# Altium PCB PCB.PcbDoc
Units mil, origin at the board's own origin, x right, y up, seen from the top; angles counter-clockwise.
Board outline 6000 x 4000 mil, 2 copper layers (Top Layer, Bottom Layer); 53 components, 28 nets, 106 pads, 0 vias.
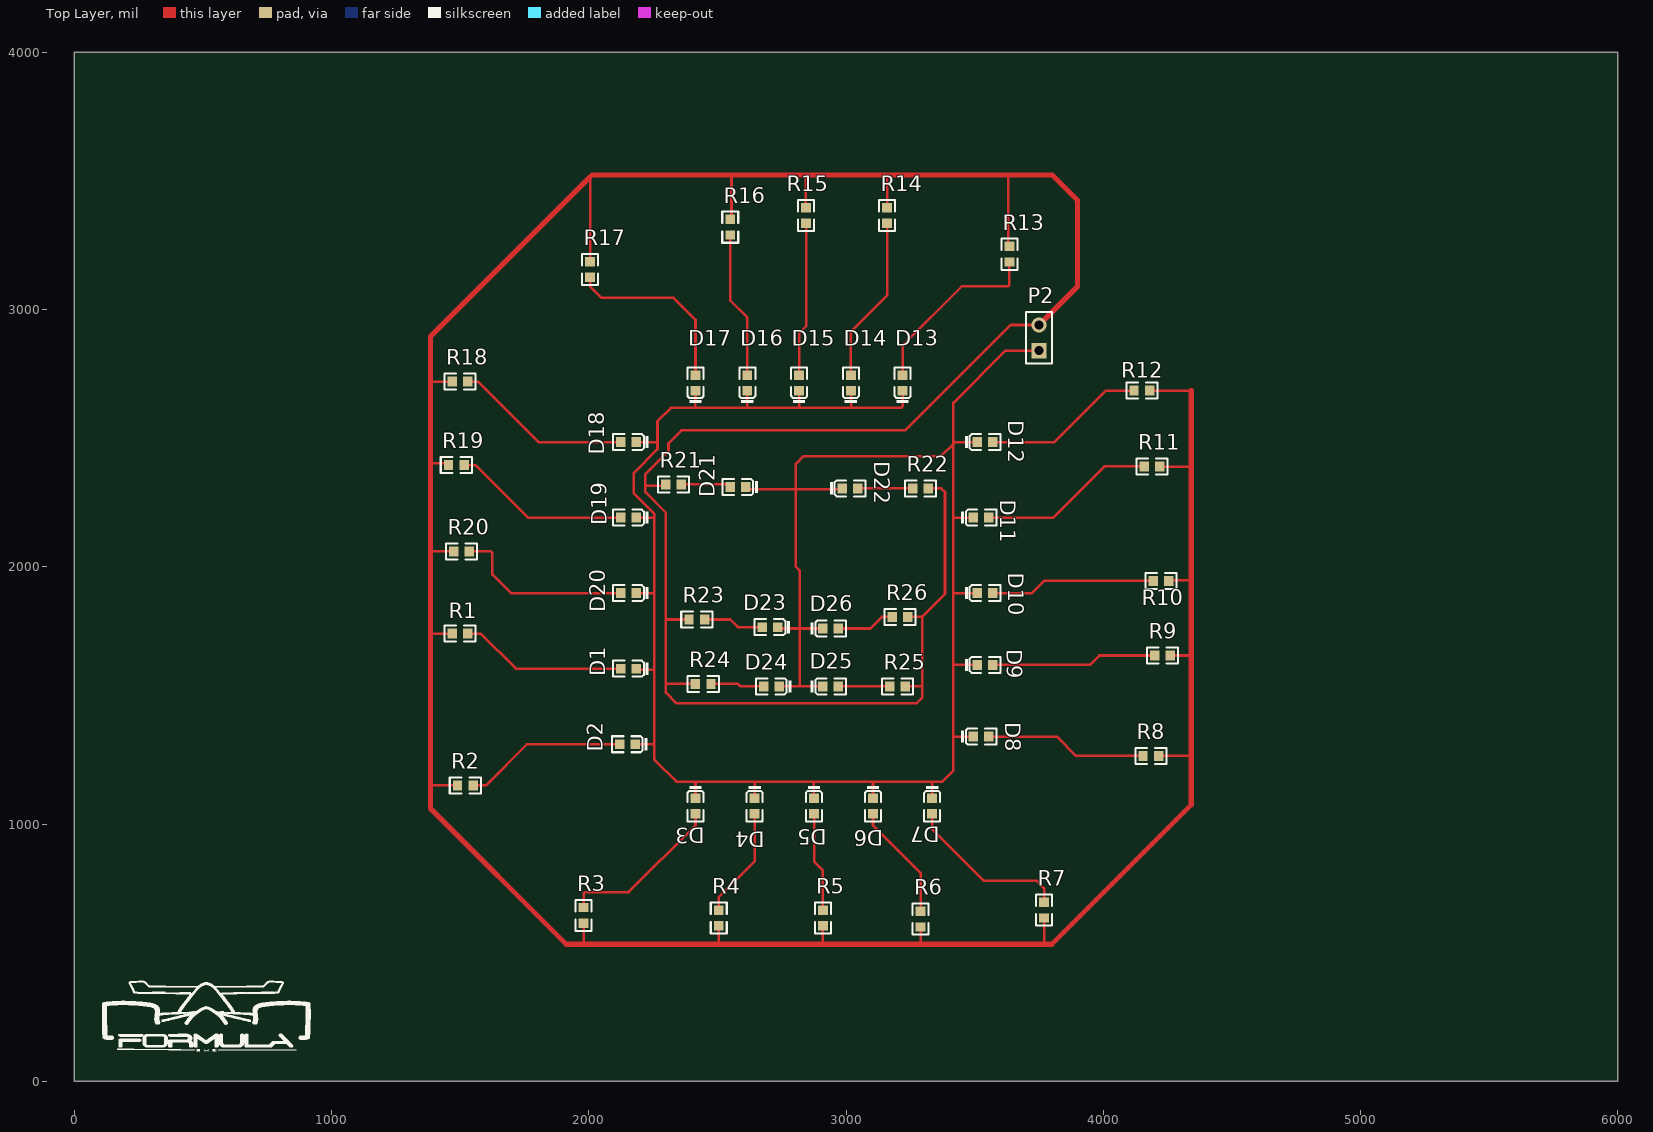
[diagram p0: Top Layer view]
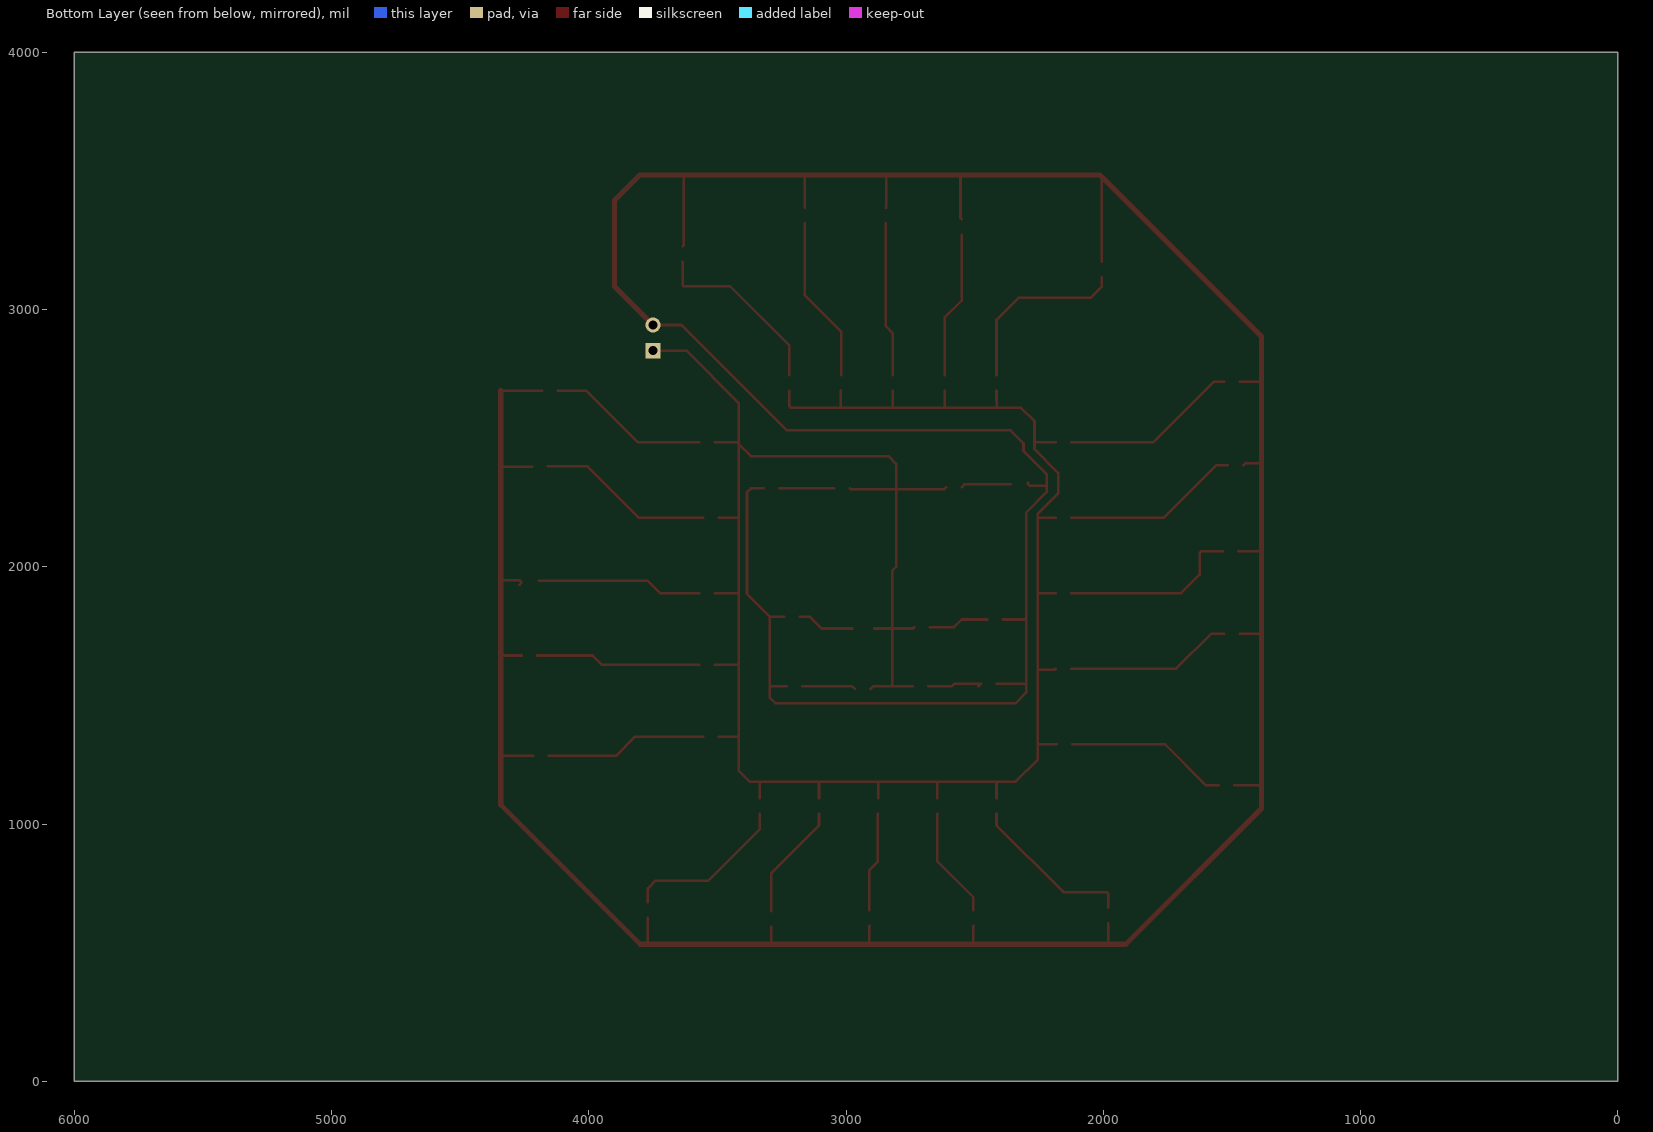
[diagram p1: Bottom Layer view, seen from below]
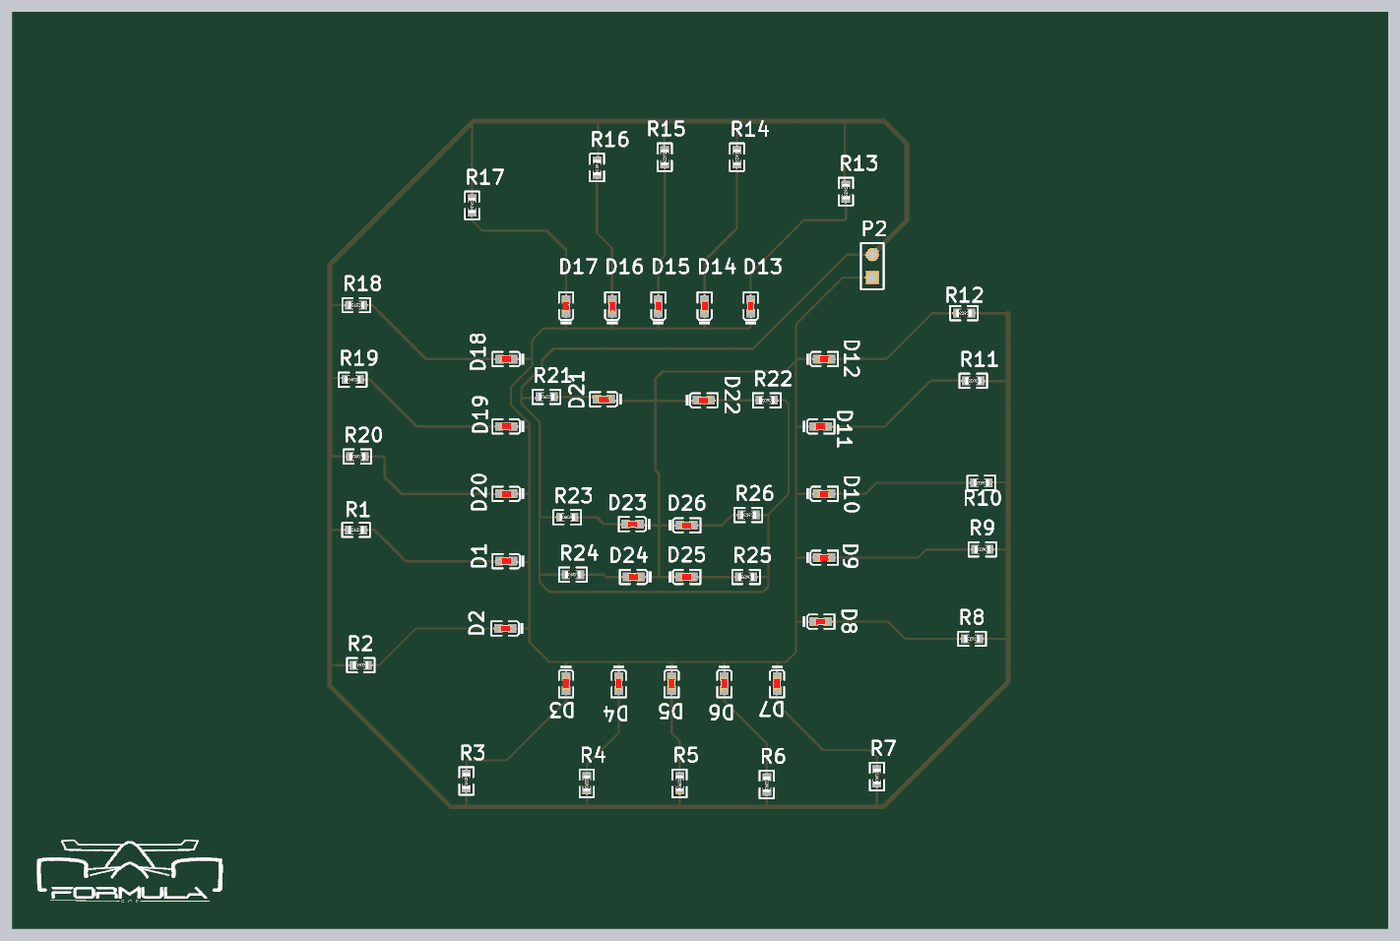
[diagram p2: 3D render of the assembled board from above, using the file's embedded part models]

## Layer stack, top to bottom
Top Solder: solder mask 0.4, Solder Resist, Dk 3.5
Top Layer: signal copper 1.4
Dielectric 1: dielectric 12.6, FR-4, Dk 4.8
Bottom Layer: signal copper 1.4
Bottom Solder: solder mask 0.4, Solder Resist, Dk 3.5

## Board outline
0,0 6000,0 6000,4000 0,4000

## Design rules (kind name [scope] priority, off if disabled: settings)
BoardOutlineClearance [All] p1: gap=7.87 ignorepadtopadclearanceinfootprint=FALSE
Clearance [All] p1: gap=5 ignorepadtopadclearanceinfootprint=FALSE except(9.84: Arc-Hole Track-Hole SMDPad-Hole THPad-Hole Via-Hole Fill-Hole Poly-Hole Region-Hole Text-Hole)
ComponentClearance [All] p1: gap=5 collisioncheckmode=3 verticalgap=5 showdistances=TRUE
DiffPairsRouting [All] p1: maxlimit=10 minlimit=5 mostfreqgap=5 toplayer_minwidth=5 toplayer_maxwidth=1000 toplayer_prefwidth=5 bottomlayer_minwidth=5 bottomlayer_maxwidth=1000 bottomlayer_prefwidth=5 maxuncoupledlength=500
Height [All] p1: minheight=0 maxheight=71497.94 prefheight=500
HoleSize [All] p1: absolutevalues=TRUE maxlimit=248.03 minlimit=11.81 maxpercent=80.000 minpercent=20.000
HoleToHoleClearance [All] p1: gap=9.84 allowstackedmicrovias=FALSE
MinimumAnnularRing [All] p1: minimumring=3
MinimumSolderMaskSliver [All] p1: minsoldermaskwidth=0
PlaneClearance [All] p1: clearance=5
PlaneConnect PlaneConnectPowerPads [InPadClass('PowerPads')] p1: planeconnectstyle=Direct reliefexpansion=20 reliefentries=4 reliefconductorwidth=10 reliefairgap=10
PlaneConnect [All] p2: pad.planeconnectstyle=Relief pad.reliefexpansion=11.81 pad.reliefentries=4 pad.reliefconductorwidth=5 pad.reliefairgap=5 via.planeconnectstyle=Direct via.reliefexpansion=11.81 via.reliefentries=4 via.reliefconductorwidth=5 via.reliefairgap=5
PolygonConnect PolygonConnectPowerPads [All vs (InPadClass('PowerPads'))] p1: connectstyle=Direct reliefconductorwidth=10 reliefentries=4 polygonreliefangle="90 Angle" airgapwidth=10
PolygonConnect [All] p2: thpad.connectstyle=Relief thpad.reliefconductorwidth=5 thpad.reliefentries=4 thpad.polygonreliefangle="90 Angle" thpad.airgapwidth=5 smdpad.connectstyle=Relief smdpad.reliefconductorwidth=5 smdpad.reliefentries=4 smdpad.polygonreliefangle="90 Angle" smdpad.airgapwidth=5 via.connectstyle=Direct via.reliefconductorwidth=5 via.reliefentries=4 via.polygonreliefangle="90 Angle" via.airgapwidth=5
RoutingVias [All] p1: holewidth=11.81 width=23.62 viastyle="Through Hole" minholewidth=11.81 minwidth=23.62 maxholewidth=23.62 maxwidth=259.84
SilkToSilkClearance [All] p1: silktosilkclearance=0
SilkToSolderMaskClearance [IsPad] p1: minsilkscreentomaskgap=5 clearancetoexposedcopper=TRUE
SolderMaskExpansion [All] p1: expansion=2.95 istentingtop=FALSE
Width [All] p1: maxlimit=1000 minlimit=5 preferedwidth=5 minimp=50.000000 maximp=50.000000 favimp=50.000000
20 further rules are at their usual default settings.

## Components (designator, comment, footprint, x,y, rotation, side; value= is the part's Value field where it differs from the comment)
D1 "0603 Red" 0603_LED_S1 2155,1603.67 r180 top
D2 "0603 Red" 0603_LED_S1 2150,1310 r180 top
D3 "0603 Red" 0603_LED_S1 2415,1070 r270 top
D4 "0603 Red" 0603_LED_S1 2645,1070 r270 top
D5 "0603 Red" 0603_LED_S1 2875,1070 r270 top
D6 "0603 Red" 0603_LED_S1 3105,1070 r270 top
D7 "0603 Red" 0603_LED_S1 3335,1070 r270 top
D8 "0603 Red" 0603_LED_S1 3525,1340 r0 top
D9 "0603 Red" 0603_LED_S1 3540,1618.75 r0 top
D10 "0603 Red" 0603_LED_S1 3540,1897.5 r0 top
D11 "0603 Red" 0603_LED_S1 3525,2191.01 r0 top
D12 "0603 Red" 0603_LED_S1 3540,2484.68 r0 top
D13 "0603 Red" 0603_LED_S1 3220,2715 r90 top
D14 "0603 Red" 0603_LED_S1 3018.75,2715 r90 top
D15 "0603 Red" 0603_LED_S1 2817.5,2715 r90 top
D16 "0603 Red" 0603_LED_S1 2616.25,2715 r90 top
D17 "0603 Red" 0603_LED_S1 2415,2715 r90 top
D18 "0603 Red" 0603_LED_S1 2155,2484.68 r180 top
D19 "0603 Red" 0603_LED_S1 2155,2191.01 r180 top
D20 "0603 Red" 0603_LED_S1 2155,1897.34 r180 top
D21 "0603 Red" 0603_LED_S1 2580,2309.68 r180 top
D22 "0603 Red" 0603_LED_S1 3015,2305 r0 top
D23 "0603 Red" 0603_LED_S1 2705,1765 r180 top
D24 "0603 Red" 0603_LED_S1 2710,1535 r180 top
D25 "0603 Red" 0603_LED_S1 2940,1535 r0 top
D26 "0603 Red" 0603_LED_S1 2940.31,1760 r0 top
P2 "Header 2" HDR1X2 3750,2840 r90 top
R1 "1KΩ ±1%" 0603_R 1499.68,1740 r0 top
R2 "1KΩ ±1%" 0603_R 1520,1150 r0 top
R3 "1KΩ ±1%" 0603_R 1980.31,645 r90 top
R4 "1KΩ ±1%" 0603_R 2505.31,635 r90 top
R5 "1KΩ ±1%" 0603_R 2910,635 r90 top
R6 "1KΩ ±1%" 0603_R 3290,630 r90 top
R7 "1KΩ ±1%" 0603_R 3770.31,665 r90 top
R8 "1KΩ ±1%" 0603_R 4185,1265 r180 top
R9 "1KΩ ±1%" 0603_R 4230.32,1655 r180 top
R10 "1KΩ ±1%" 0603_R 4224.69,1945 r180 top
R11 "1KΩ ±1%" 0603_R 4190,2390 r180 top
R12 "1KΩ ±1%" 0603_R 4150,2685 r180 top
R13 "1KΩ ±1%" 0603_R 3635,3215 r270 top
R14 "1KΩ ±1%" 0603_R 3160,3365 r270 top
R15 "1KΩ ±1%" 0603_R 2845,3365 r270 top
R16 "1KΩ ±1%" 0603_R 2550,3320 r270 top
R17 "1KΩ ±1%" 0603_R 2005,3155 r270 top
R18 "1KΩ ±1%" 0603_R 1500,2720 r0 top
R19 "1KΩ ±1%" 0603_R 1485,2395 r0 top
R20 "1KΩ ±1%" 0603_R 1505.31,2060 r0 top
R21 "1KΩ ±1%" 0603_R 2330,2320 r0 top
R22 "1KΩ ±1%" 0603_R 3290,2305 r180 top
R23 "1KΩ ±1%" 0603_R 2420,1795 r0 top
R24 "1KΩ ±1%" 0603_R 2445,1545 r0 top
R25 "1KΩ ±1%" 0603_R 3200,1535 r180 top
R26 "1KΩ ±1%" 0603_R 3210,1805 r180 top

## Footprints (in the part's own frame and the unit in brackets; to place one, negate y for a bottom-side part, rotate by r counter-clockwise, add the part's x,y. Pads: shape width x height; smd on the part's side, far side on the other; paste and mask are expansions set on the pad)
0603_LED_S1 [mm]
  rect 0.93x0.98 smd: A(0.77,0) K(-0.77,0)
  silkscreen extent -1.98,-0.79 1.54,0.79, body extent -0.8,-0.4 0.8,0.4, height 0.6
0603_R [mm]
  rect 0.93x0.98 smd: 1(-0.77,0) 2(0.77,0)
  silkscreen extent -1.53,-0.79 1.54,0.79, body extent -0.85,-0.4 0.85,0.4, height 0.56
HDR1X2 [mm] "Connector; Header; 2 Position"
  rect 1.5x1.5 hole 0.9: 1(0,0)
  round 1.5 hole 0.9: 2(2.54,0)
  silkscreen extent -1.27,-1.27 3.81,1.27

## Part data
D1 D2 D3 D4 D5 D6 D7 D8 D9 D10 D11 D12 D13 D14 D15 D16 D17 D18 D19 D20 D21 D22 D23 D24 D25 D26: library part "0603 LED Red", "LED", Color=Red, Package=0603, SuppliersPartNumber=C2286, ComponentLink1Description=供应商链接, ComponentLink1URL=http://www.szlcsc.com/product/details_2659.html, Supplier=LC
P2: "Header, 2-Pin", LatestRevisionDate=17-Jul-2002, LatestRevisionNote="Re-released for DXP Platform.", Publisher="Altium Limited"
R1 R2 R3 R4 R5 R6 R7 R8 R9 R10 R11 R12 R13 R14 R15 R16 R17 R18 R19 R20 R21 R22 R23 R24 R25 R26: library part "0603 1K (1001) 1%", "Chip resistor", Manufacturer="Uniroyal Elec", Package=0603, PartNumber=0603WAF1001T5E, Power=1/10W, Resistance=1KΩ, SuppliersPartNumber=C21190, Tolerance=1%, ComponentLink1Description="Supplier link", ComponentLink1URL=http://www.szlcsc.com/product/details_21904.html, Supplier=LC

## Nets (pads, with @x,y where several pads share a name; then routed paths per layer and width w, separated by ;. In a path a pad name is that pad's centre, name@x,y a point inside that pad or via, vN(x,y) a via of type N, cw(c..) or ccw(c..) an arc to the next point about the centre after c; other vN are vias at no path point)
+12: P2.2 R1.1 R2.1 R3.1 R4.1 R5.1 R6.1 R7.1 R8.1 R9.1 R10.1 R11.1 R12.1 R13.1 R14.1 R15.1 R16.1 R17.1 R18.1 R19.1 R20.1 R21.1 R22.1 R23.1 R24.1 R25.1 R26.1 | length 17687
  Top Layer w10: 1384.69,1740 R1.1 ; 1385,1150 R2.1 ; 1385,2060 R20.1 ; 1385,2405 1387.93,2402.07 1447.61,2402.07 R19.1 ; 1385,2722.93 1387.93,2720 R18.1 ; R3.1 1980.31,534.69 1982.5,532.5 ; R17.1 2005,3515 2012.93,3522.93 ; R21.1@2292.34,2327.34 2292.34,2320.96 2286.38,2315 2220,2315 ; R23.1 2300,1795 ; R24.1 2299.69,1545 ; 2497.5,532.5 2505.31,540.31 R4.1 ; R16.1 2555,3355.31 2555,3520 2557.93,3522.93 ; R15.1 2843.62,3396.7 2843.62,3521.38 2845.17,3522.93 ; 2902.07,532.5 2910,540.43 R5.1 ; R14.1 3160,3522.93 ; R25.1 3297.07,1535 ; R26.1 3297.07,1805 ; 3290,532.5 R6.1 ; R22.1 3370,2305 3385,2290 3385,1895 3297.07,1807.07 3297.07,1805 ; 3630,3522.93 3630,3250.31 R13.1 ; P2.2 3640,2940 3230,2530 2360,2530 2310,2480 2310,2450 2220,2360 2220,2315 ; 3770.31,532.5 R7.1 ; 3799.69,532.5 3800,532.81 ; R12.1 4342.07,2685 ; R8.1 4340,1265 ; R11.1@4220.31,2389.02 4342.07,2389.02 ; R9.1 4342.07,1655 ; R10.1@4270,1930 4262.5,1937.5 4262.5,1941.26 4268.31,1947.07 4342.07,1947.07 ; 2220,2315 2220,2290 2300,2210 2300,1795 ; 2299.69,1545 2299.69,1794.69 2300,1795 ; 2299.69,1545 2299.69,1510.31 2340,1470 3275,1470 3297.07,1492.07 3297.07,1535 ; 3297.07,1535 3297.07,1805
  Top Layer w20: 1384.69,2055.23 1384.69,1740 1384.69,1060.31 1912.5,532.5 1982.5,532.5 2497.5,532.5 2902.07,532.5 3290,532.5 3770.31,532.5 3799.69,532.5 ; 1385,2055.23 1385,2060 1385,2405 1385,2722.93 1385,2895 2005,3515 ; 2012.93,3522.93 2557.93,3522.93 2845.17,3522.93 3160,3522.93 3802.07,3522.93 3900,3425 3900,3090 P2.2 ; 3800,532.81 4342.07,1074.89 4342.07,1655 4342.07,1947.07 4342.07,2389.02 4342.07,2685
GND: D1.K D2.K D3.K D4.K D5.K D6.K D7.K D8.K D9.K D10.K D11.K D12.K D13.K D14.K D15.K D16.K D17.K D18.K D19.K D20.K D21.K D22.K D23.K D24.K D25.K D26.K P2.1 | length 9082.8
  Top Layer w10: D2.K 2254,1310 ; D1.K 2188.99,1600 2254.3,1600 ; D20.K 2255,1897.34 ; D19.K 2213.99,2191.01 2215,2190 2255,2190 ; D18.K 2267.07,2484.68 ; 2255,1250 2255,1897.34 ; 2255.71,1249.29 2340.61,1164.39 2415,1164.39 ; D3.K 2415,1164.39 ; D17.K 2415,2647.37 2413.85,2646.22 2413.85,2617.93 ; D21.K 2617.93,2302.07 2805,2302.07 ; D16.K 2616.25,2617.93 ; D4.K 2645,1164.39 ; D23.K 2740.31,1760 2820,1760 ; D24.K 2820,1535 ; 2817.5,2623.36 D15.K ; D5.K 2875,1164.39 ; 2889.69,1760 2820,1760 ; D25.K@2904.69,1525 2894.69,1535 2820,1535 ; D22.K 2981.76,2302.07 2805,2302.07 ; D14.K 3020,2683.43 3020,2617.93 ; D6.K 3105,1158.79 ; D13.K 3220,2625 3212.93,2617.93 3020,2617.93 ; D7.K 3335,1164.39 ; D8.K 3417.34,1340 ; D11.K 3417.34,2191.01 ; D9.K 3417.34,1618.75 ; D10.K 3417.5,1897.5 3417.34,1897.34 ; D12.K 3424.68,2484.68 3417.34,2477.34 ; P2.1 3620,2840 3417.34,2637.34 3417.34,2477.34 ; 2255,1897.34 2255,2190 ; 2255,2190 2255,2205 2175,2285 2175,2365 2267.07,2457.07 2267.07,2484.68 ; 2267.07,2484.68 2267.07,2566.15 2318.85,2617.93 2413.85,2617.93 ; 2413.85,2617.93 2616.25,2617.93 ; 2415,1164.39 2645,1164.39 ; 2616.25,2617.93 3020,2617.93 ; 2645,1164.39 2875,1164.39 ; 2805,2302.07 2805,2400 2835,2430 3370,2430 3417.34,2477.34 ; 2805,2302.07 2805,2000 2820,1985 2820,1760 ; 2820,1535 2820,1760 ; 2875,1164.39 3335,1164.39 ; 3335,1164.39 3374.39,1164.39 3417.34,1207.34 3417.34,1340 ; 3417.34,1340 3417.34,1618.75 ; 3417.34,1618.75 3417.34,1897.34 ; 3417.34,1897.34 3417.34,2191.01 ; 3417.34,2191.01 3417.34,2477.34
NetD1_A: D1.A R1.2 | length 651.2
  Top Layer w10: R1.2 1580,1740 1716.33,1603.67 D1.A
NetD2_A: D2.A R2.2 | length 635.6
  Top Layer w10: R2.2 1600,1150 1760,1310 D2.A
NetD3_A: D3.A R3.2 | length 643.3
  Top Layer w10: R3.2 1980.31,729.14 1986.17,735 2155,735 2415,995 D3.A
NetD4_A: D4.A R4.2 | length 432.2
  Top Layer w10: R4.2 2505.31,715.31 2645,855 D4.A
NetD5_A: D5.A R5.2 | length 388.5
  Top Layer w10: D5.A@2875.98,1039.68 2875.98,854.02 2910,820 R5.2
NetD6_A: D6.A R6.2 | length 456
  Top Layer w10: D6.A 3105,995 3290,810 R6.2
NetD7_A: D7.A R7.2 | length 644.8
  Top Layer w10: D7.A 3335,980 3535,780 3740,780 3770.31,749.69 R7.2
NetD8_A: D8.A R8.2 | length 630.4
  Top Layer w10: D8.A 3820,1340 3895,1265 R8.2
NetD9_A: D9.A R9.2 | length 644.7
  Top Layer w10: D9.A 3948.75,1618.75 3985,1655 R9.2
NetD10_A: D10.A R10.2 | length 643.7
  Top Layer w10: D10.A 3722.5,1897.5 3770,1945 R10.2
NetD11_A: D11.A R11.2 | length 687.6
  Top Layer w10: D11.A 3556.33,2190 3805,2190 4005,2390 R11.2
NetD12_A: D12.A R12.2 | length 632.3
  Top Layer w10: D12.A 3809.68,2484.68 4010,2685 R12.2
NetD13_A: D13.A R13.2 | length 716.2
  Top Layer w10: D13.A 3220,2860 3450,3090 3629.14,3090 3635,3095.86 R13.2
NetD14_A: D14.A R14.2 | length 647.9
  Top Layer w10: D14.A 3018.75,2913.75 3160,3055 R14.2
NetD15_A: D15.A R15.2 | length 600.8
  Top Layer w10: D15.A 2817.5,2907.5 2845,2935 R15.2
NetD16_A: D16.A R16.2 | length 571.8
  Top Layer w10: R16.2 2550,3035 2616.25,2968.75 D16.A
NetD17_A: D17.A R17.2 | length 713.2
  Top Layer w10: R17.2 2005,3090 2050,3045 2330,3045 2415,2960 D17.A
NetD18_A: D18.A R18.2 | length 691.8
  Top Layer w10: R18.2 1570,2720 1805.32,2484.68 D18.A
NetD19_A: D19.A R19.2 | length 693.9
  Top Layer w10: R19.2 1560,2395 1763.99,2191.01 D19.A
NetD20_A: D20.A R20.2 | length 705.7
  Top Layer w10: R20.2 1619.14,2060 1625,2054.14 1625,1970 1697.66,1897.34 D20.A
NetD21_A: D21.A R21.2 | length 193.6
  Top Layer w10: R21.2 2539.37,2320 D21.A
NetD22_A: D22.A R22.2 | length 214.4
  Top Layer w10: D22.A R22.2
NetD23_A: D23.A R23.2 | length 236.8
  Top Layer w10: R23.2 2550,1795 2580,1765 D23.A
NetD24_A: D24.A R24.2 | length 222.7
  Top Layer w10: R24.2@2485.32,1535 R24.2 2580,1545 2590,1535 D24.A
NetD25_A: D25.A R25.2 | length 208.5
  Top Layer w10: D25.A@2965.32,1525 2975.32,1535 R25.2
NetD26_A: D26.A R26.2 | length 223.3
  Top Layer w10: D26.A@2975,1760 3095,1760 3140,1805 R26.2

## Silkscreen, mask and mechanical layers (free items; w line width, h text height)
Top Overlay:
  drawing of 13 lines, arcs and shapes, not listed